# Altium PCB bigpine-camera.PcbDoc
Units mm, origin at the board's own origin, x right, y up, seen from the top; angles counter-clockwise.
Board outline 120 x 52.5 mm, 4 copper layers (Top Layer, Signal Layer 1, Signal Layer 2, Bottom Layer), stack 1.667 mm thick; 18 components, 30 nets, 109 pads, 195 vias.
Unrouted connection lines stored in the file: 32.
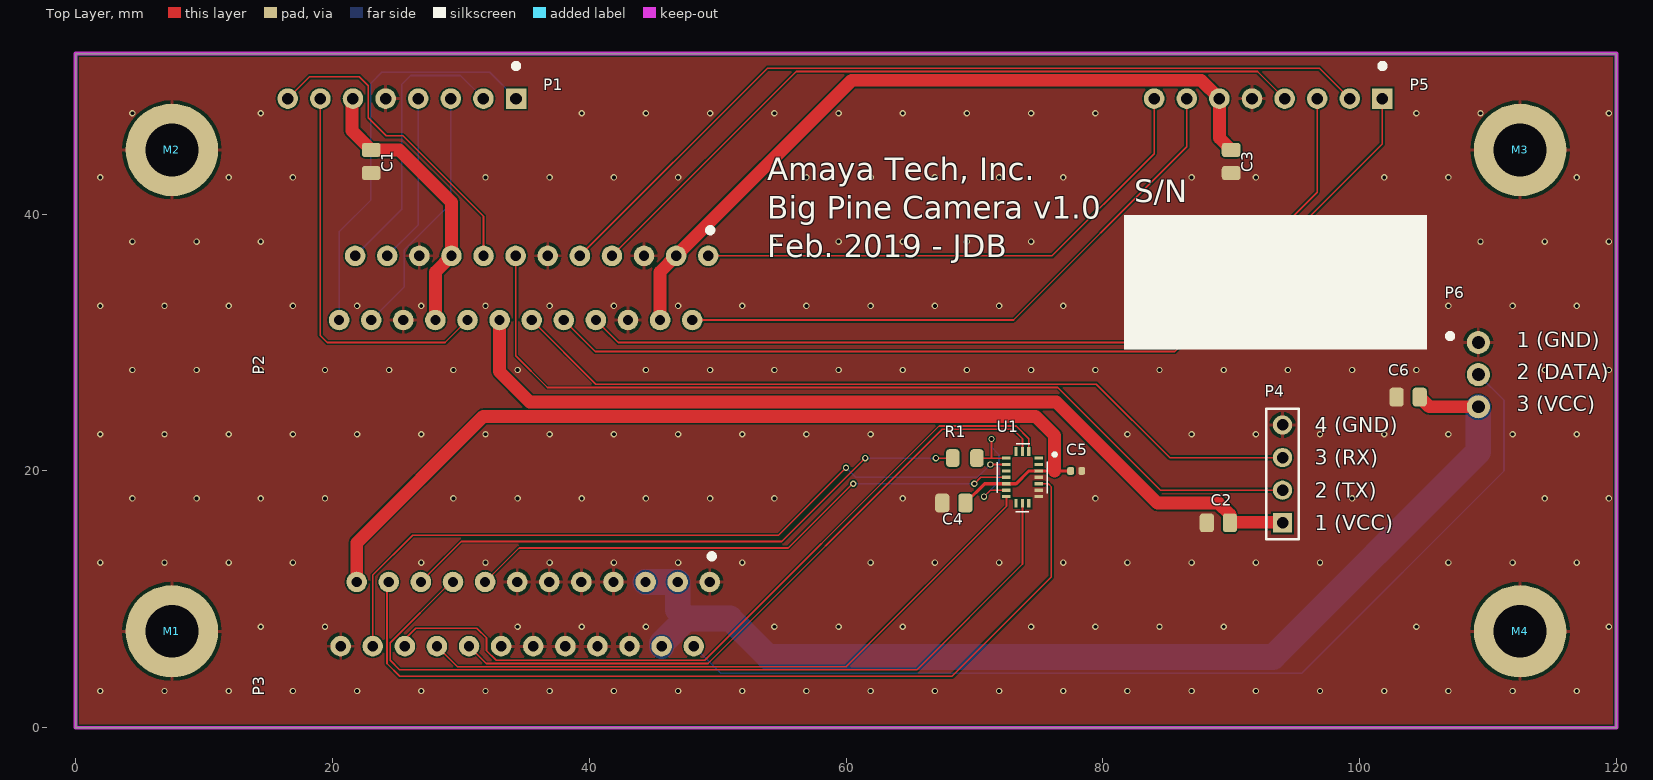
[diagram p0: Top Layer view]
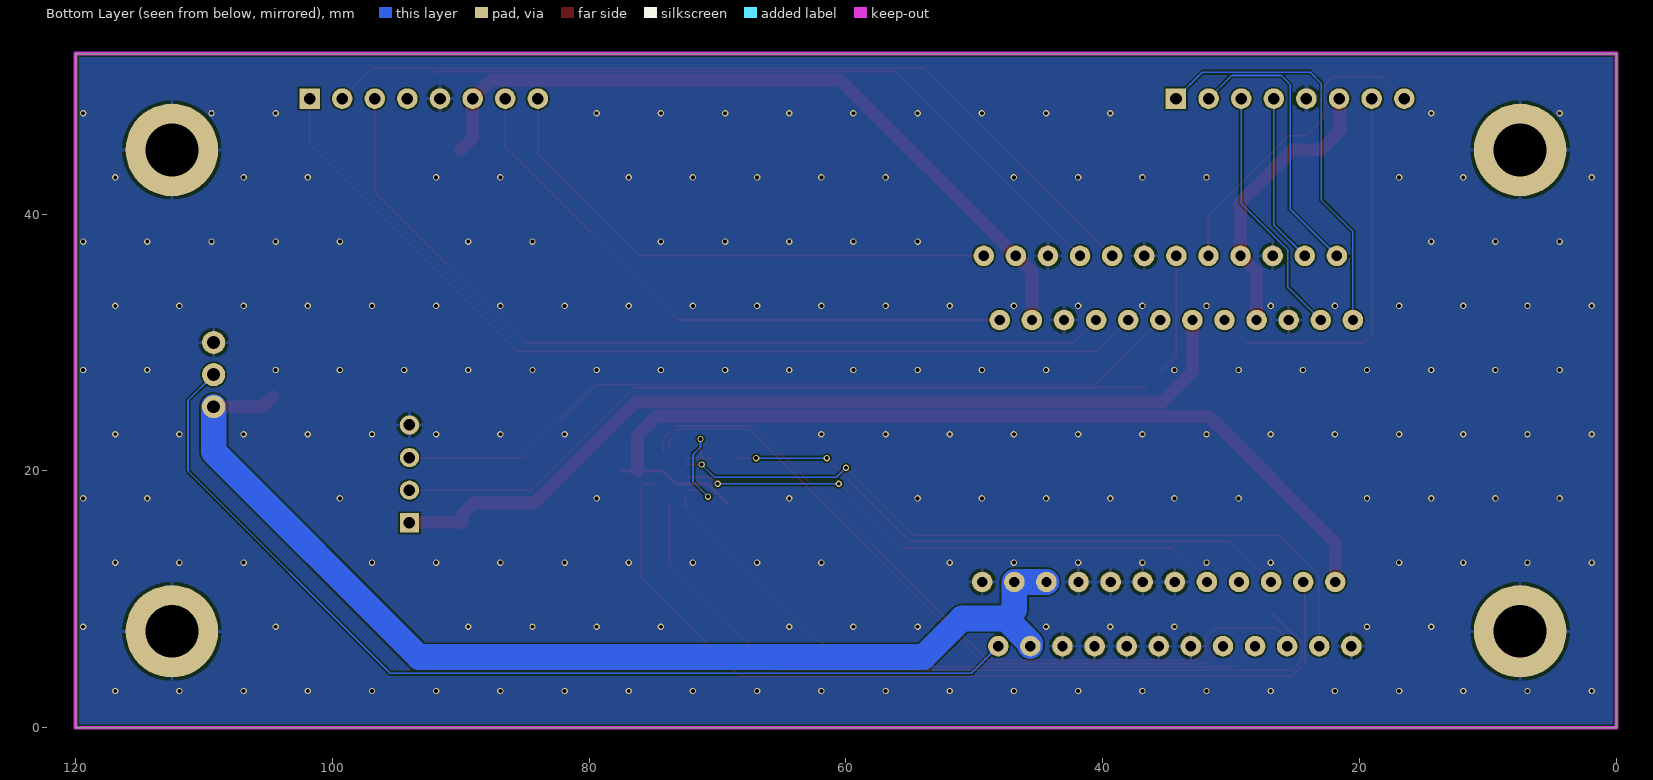
[diagram p1: Bottom Layer view, seen from below]
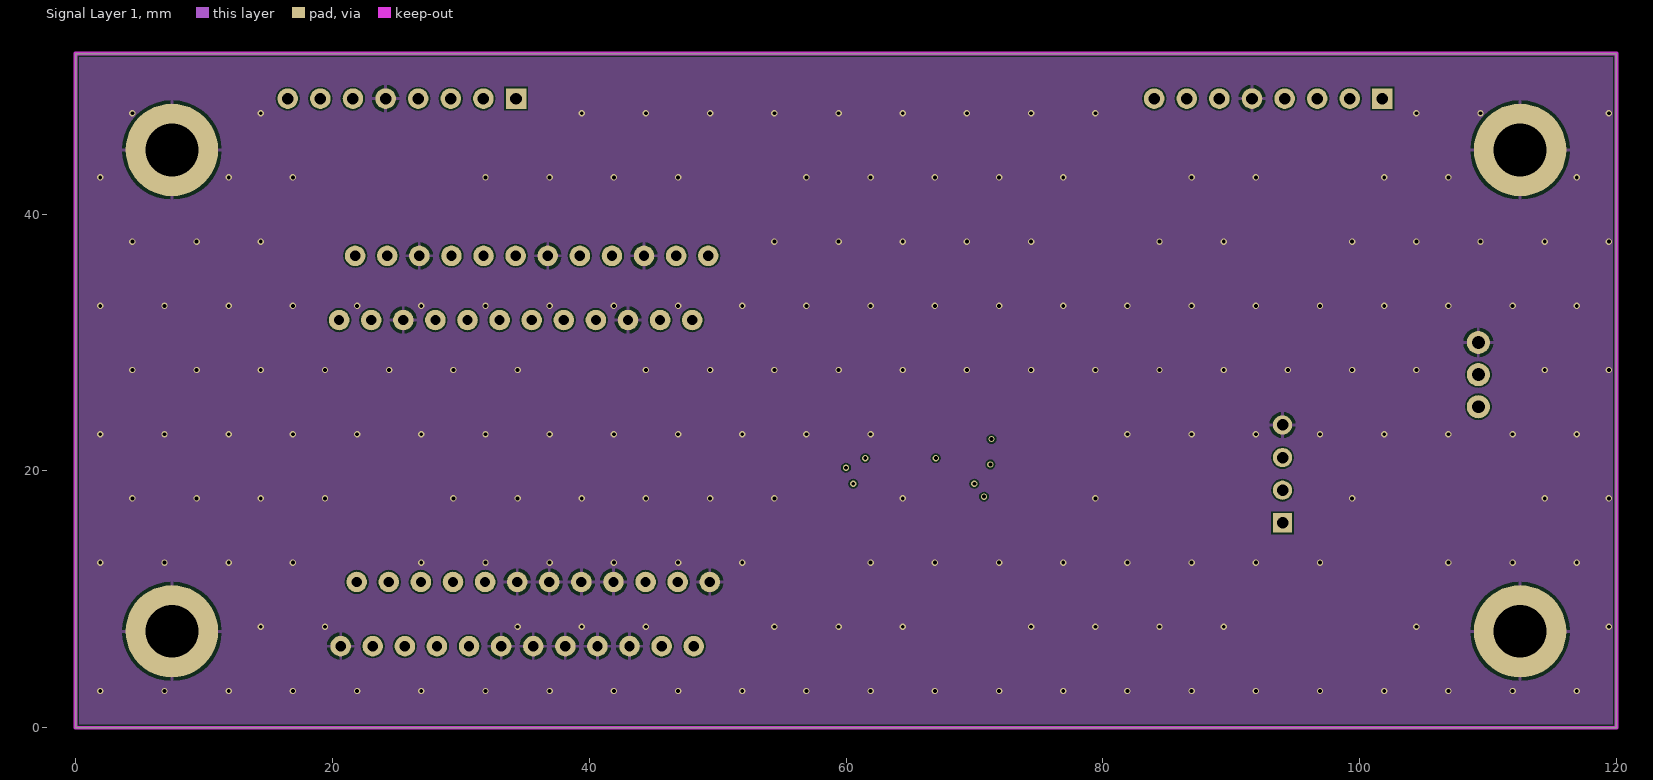
[diagram p2: Signal Layer 1]
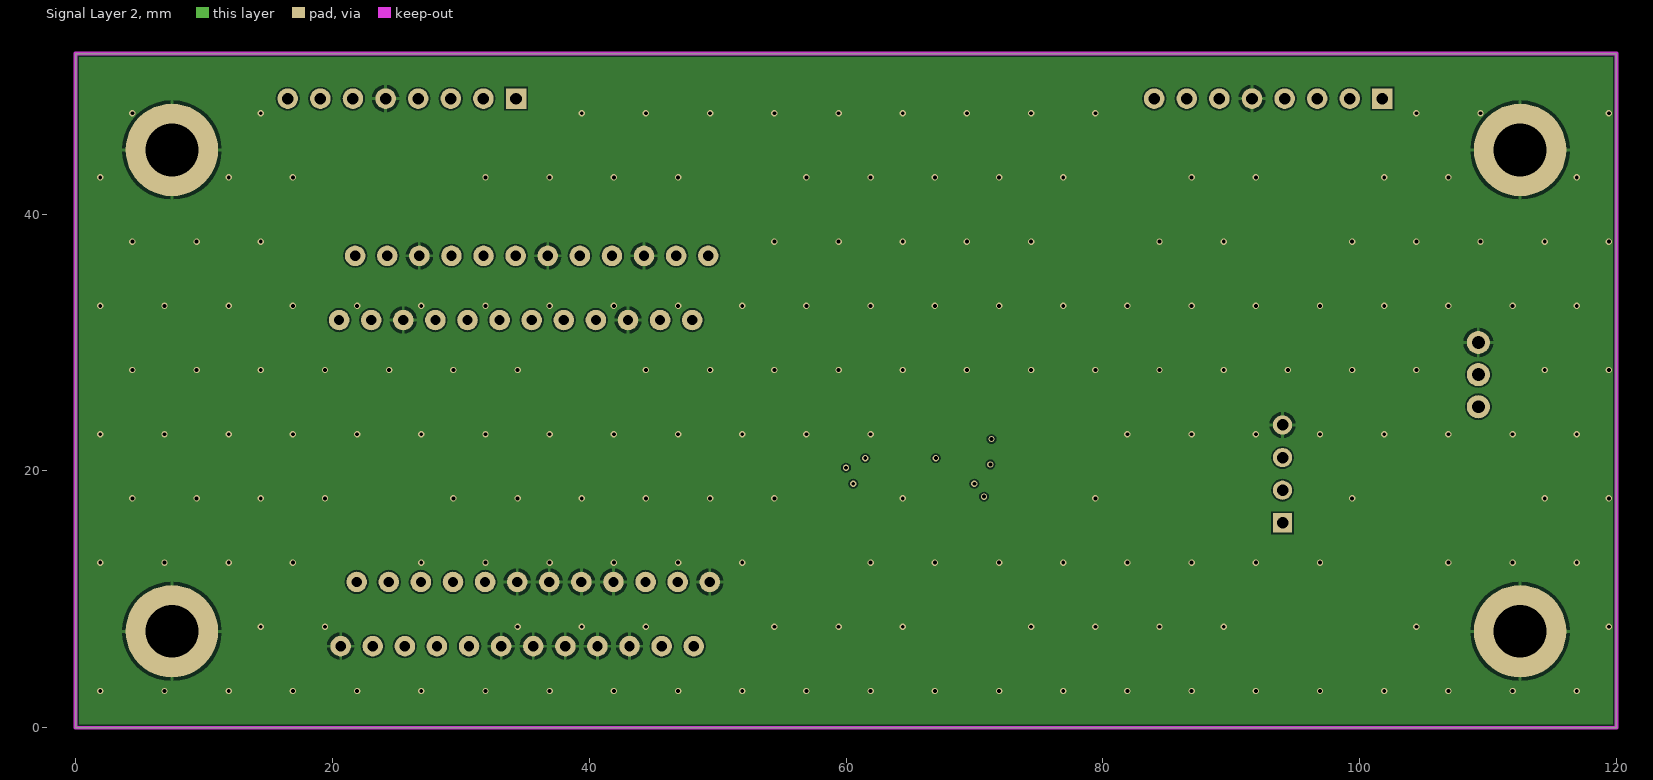
[diagram p3: Signal Layer 2]
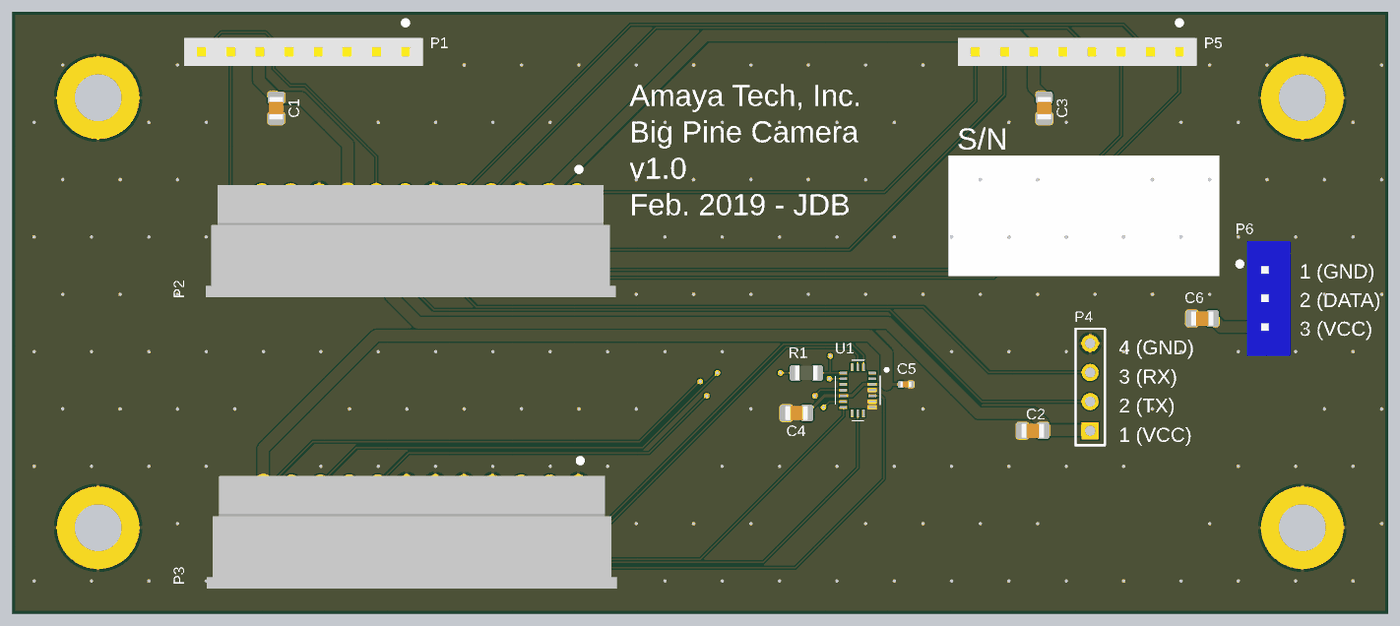
[diagram p4: 3D render of the assembled board from above, using the file's embedded part models]

## Layer stack, top to bottom
Top Solder: solder mask 0.0102, Solder Resist, Dk 3.5
Top Layer: signal copper 0.0356
Dielectric1: core 1.143, FR-4, Dk 4.8
Signal Layer 1: signal copper 0.036
Dielectric 3: prepreg 0.127, Dk 4.2
Signal Layer 2: signal copper 0.036
Dielectric 2: core 0.254, Dk 4.2
Bottom Layer: signal copper 0.0356
Bottom Solder: solder mask 0.0102, Solder Resist, Dk 3.5

## Board outline
0,0 0,52.5 120,52.5 120,0

## Design rules (kind name [scope] priority, off if disabled: settings)
Clearance [All] p1: gap=0.125 ignorepadtopadclearanceinfootprint=FALSE
ComponentClearance [All] p1 off: gap=0.254 collisioncheckmode=3 verticalgap=0.254 showdistances=FALSE
HoleSize [All] p1: absolutevalues=TRUE maxlimit=100 minlimit=0.3 maxpercent=80.000 minpercent=20.000
MinimumSolderMaskSliver [All] p1: minsoldermaskwidth=0.1
PlaneConnect [All] p1: pad.planeconnectstyle=Relief pad.reliefexpansion=0.508 pad.reliefentries=4 pad.reliefconductorwidth=0.254 pad.reliefairgap=0.254 via.planeconnectstyle=Direct via.reliefexpansion=0.508 via.reliefentries=4 via.reliefconductorwidth=0.254 via.reliefairgap=0.254
PolygonConnect [All] p1: thpad.connectstyle=Relief thpad.reliefconductorwidth=0.254 thpad.reliefentries=4 thpad.polygonreliefangle="90 Angle" thpad.airgapwidth=0.254 smdpad.connectstyle=Direct smdpad.reliefconductorwidth=0.254 smdpad.reliefentries=4 smdpad.polygonreliefangle="90 Angle" smdpad.airgapwidth=0.254 via.connectstyle=Direct via.reliefconductorwidth=0.254 via.reliefentries=4 via.polygonreliefangle="90 Angle" via.airgapwidth=0.254
RoutingVias [All] p1: holewidth=0.3 width=0.5 viastyle="Through Hole" minholewidth=0.3 minwidth=0.5 maxholewidth=1 maxwidth=1.2
SilkToSilkClearance [All] p1: silktosilkclearance=0.1
SilkToSolderMaskClearance SilkscreenOverComponentPads [IsPad] p1: minsilkscreentomaskgap=0.1 clearancetoexposedcopper=TRUE
SolderMaskExpansion [All] p1: expansion=0.05
Width [All] p1: maxlimit=500 minlimit=0.125 preferedwidth=0.125
24 further rules are at their usual default settings.

## Classes and differential pairs
component class camera: C1 C2 C4 C5 C6 M1 M2 M3 M4 P1 P2 P3 P4 P5 P6 R1 U1

## Components (designator, comment, footprint, x,y, rotation, side; value= is the part's Value field where it differs from the comment)
C1 "CL21B106KOQNNNE" CAPC200X125X145L45N 23.02,44.1 r270 top value=10uF
C2 "CL21B106KOQNNNE" CAPC200X125X145L45N 89,15.96 r180 top value=10uF
C3 "CL21B106KOQNNNE" CAPC200X125X145L45N 90,44.1 r270 top value=10uF
C4 "CL21B106KOQNNNE" CAPC200X125X145L45N 68.4,17.5 r180 top value=10uF
C5 "C1005X7R1E224K050BE" CAPC100X50X55L25N 77.93,20 r0 top value=220nF
C6 "CL21B106KOQNNNE" CAPC200X125X145L45N 103.78,25.75 r180 top value=10uF
M1 "MOUNT" M4_MOUNT 7.5,7.5 r0 top locked
M2 "MOUNT" M4_MOUNT 7.5,45 r0 top locked
M3 "MOUNT" M4_MOUNT 112.5,45 r0 top locked
M4 "MOUNT" M4_MOUNT 112.5,7.5 r0 top locked
P1 "SSW-108-01-F-S" SSW-108-01-F-S 25.41,49 r180 top
P2 "0039532244" 0039532244 34.745,32.5 r180 top locked
P3 "0039532244" 0039532244 34.865,7.1 r180 top locked
P4 "B4B-XH-A" HDR1X4 94,15.96 r90 top
P5 "SSW-108-01-F-S" SSW-108-01-F-S 92.89,49 r180 top
P6 "B3B-EH-A" B3B-EH-A 109.55,27.5 r270 top locked
R1 "ERJ-6ENF22R0V" RESC2012X70N 69.25,21 r180 top value=22
U1 "BMX055" BMX055 73.738,19.5 r0 top

## Footprints (in the part's own frame and the unit in brackets; to place one, negate y for a bottom-side part, rotate by r counter-clockwise, add the part's x,y. Pads: shape width x height; smd on the part's side, far side on the other; paste and mask are expansions set on the pad)
0039532244 [mm] "FPC connector"
  round 1.6 hole 0.8: 1(-14.525,-4.25) 2(-13.275,0.75) 3(-12.025,-4.25) 4(-10.775,0.75) 5(-9.525,-4.25) 6(-8.275,0.75) 7(-7.025,-4.25) 8(-5.775,0.75) 9(-4.525,-4.25) 10(-3.275,0.75) 11(-2.025,-4.25) 12(-0.775,0.75) 13(0.475,-4.25) 14(1.725,0.75) 15(2.975,-4.25) 16(4.225,0.75) 17(5.475,-4.25) 18(6.725,0.75) 19(7.975,-4.25) 20(9.225,0.75) 21(10.475,-4.25) 22(11.725,0.75) 23(12.975,-4.25) 24(14.225,0.75)
  silkscreen extent -14.88,-6.45 -14.48,-6.05, body extent -17.88,-4.9 17.88,4.9, height 5.4
B3B-EH-A [mm] "2.5mm pitch crimp connector"
  round 1.8 hole 1: 1(-2.5,-0.3) 2(0,-0.3) 3(2.5,-0.3)
  silkscreen extent -3.2,-2.7 -2.8,-2.3, body extent -5,-1.9 5,1.9, height 6
BMX055 [mm] "BST-BMX055-DS000-00"
  rect 0.675x0.25 smd paste-0.025 mask+0.07: 1(1.262,1.5) 2(1.262,1) 3(1.262,0.5) 4(1.262,0) 5(1.262,-0.5) 6(1.262,-1) 7(1.262,-1.5) 11(-1.262,-1.5) 12(-1.262,-1) 13(-1.262,-0.5) 14(-1.262,0) 15(-1.262,0.5) 16(-1.262,1) 17(-1.262,1.5)
  rect 0.25x0.675 smd paste-0.025 mask+0.07: 8(0.5,-2.013) 9(0,-2.013) 10(-0.5,-2.013) 18(-0.5,2.013) 19(0,2.013) 20(0.5,2.013)
  silkscreen extent -1.96,-2.67 2.64,2.62, body extent -1.5,-2.25 1.5,2.25, height 1
CAPC100X50X55L25N [mm] "Capacitor, Chip; 1.00 mm L X 0.50 mm W X 0.55 mm H body"
  rrect52% 0.54x0.6 smd: 1(-0.43,0) 2(0.43,0)
  body extent -0.5,-0.25 0.5,0.25, height 0.55
CAPC200X125X145L45N [mm] "Capacitor, Chip; 2.00 mm L X 1.25 mm W X 1.45 mm H body"
  rrect45% 1.11x1.47 smd: 1(-0.9,0) 2(0.9,0)
  body extent -1,-0.63 1,0.63, height 1.45
HDR1X4 [mm] "Connector; Header; 4 Position"
  rect 1.5x1.5 hole 0.9: 1(0,0)
  round 1.5 hole 0.9: 2(2.54,0) 3(5.08,0) 4(7.62,0)
  silkscreen extent -1.27,-1.27 8.89,1.27
M4_MOUNT [mm] "M4 Clearance Hole"
  round 7.2 hole 4.1: 1(0,0)
RESC2012X70N [mm] "Resistor, Chip; 2.00 mm L X 1.25 mm W X 0.70 mm H body"
  rrect50% 1.04x1.38 smd: 1(-0.94,0) 2(0.94,0)
  body extent -1,-0.63 1,0.63, height 0.7
SSW-108-01-F-S [mm] "Through-hole post socket 0.1\" pitch"
  rect 1.6x1.6 hole 0.9: 1(-8.89,0)
  round 1.6 hole 0.9: 2(-6.35,0) 3(-3.81,0) 4(-1.27,0) 5(1.27,0) 6(3.81,0) 7(6.35,0) 8(8.89,0)
  silkscreen extent -9.09,-2.74 -8.69,-2.34, body extent -10.41,-1.21 10.41,1.21, height 8.51

## Part data
C1 C2 C3 C4 C6: library part LMK212B7106KG, "Ceramic Capacitor 10uF ±10% 16V X7R 0805", Manufacturer=Samsung, Package=0805, Tolerance=±10%, Voltage=16V, Manufacturer P/N=CL21B106KOQNNNE, Tr=-55:105
C5: library part TMK105B7224KV, "Ceramic Capacitor 220nF ±10% 25V X7R 0402", Manufacturer=TDK, Package=0402, Tolerance=±10%, Voltage=25V, Manufacturer P/N=C1005X7R1E224K050BE
P1 P5: library part "Header 8", "Through-hole post socket 0.1\" pitch", Manufacturer=Samtec, Manufacturer P/N=SSW-108-01-F-S
P2 P3: "FPC connector", Manufacturer=Molex, Manufacturer P/N=0039532244
P4: library part "Header 4", "Header, 4-Pin", Manufacturer=JST, Manufacturer P/N=B4B-XH-A
P6: library part "Header 3", "2.5mm pitch crimp connector", Manufacturer=JST, Manufacturer P/N=B3B-EH-A
R1: library part "RES 0402", "Thick Film Resistor 22 ±1% 0805", Manufacturer=Panasonic, Package=0805, Tolerance=±1%, Manufacturer P/N=ERJ-6ENF22R0V, Tr=-55:155
U1: "9-DOF Sensor Module", Manufacturer=Bosch, Manufacturer P/N=BMX055

## Via types
v1: diameter 0.5, hole 0.3, Top Layer to Bottom Layer, tented top, 187 vias
v2: diameter 0.5, hole 0.3, Top Layer to Bottom Layer, 8 vias

## Nets (pads, with @x,y where several pads share a name; then routed paths per layer and width w, separated by ;. In a path a pad name is that pad's centre, name@x,y a point inside that pad or via, vN(x,y) a via of type N, cw(c..) or ccw(c..) an arc to the next point about the centre after c; other vN are vias at no path point)
CAM1_CS: P1.1 P2.24 | length 32
  Bottom Layer w0.125: P2.24 20.52,38.62 23,41.1 23,50.2 23.85,51.05 32.25,51.05 P1.1
CAM1_MISO: P1.3 P2.22 | length 19.8
  Bottom Layer w0.125: P2.22 25.6,34.33 25.6,37.2 29.22,40.82 P1.3
CAM1_MOSI: P1.2 P2.23 | length 22.2
  Bottom Layer w0.125: P2.23 25.4,40.38 25.4,50.1 26.1,50.8 29.96,50.8 P1.2
CAM1_SCL: P1.8 P2.15 | length 25
  Top Layer w0.125: P1.8 18.22,50.7 22.1,50.7 22.8,50 22.8,47.5 24.2,46.1 25.5,46.1 31.77,39.83 P2.15
CAM1_SCLK: P1.4 P2.21 | length 13.2
  Bottom Layer w0.125: P2.21 26.68,39.16 P1.4
CAM1_SDA: P1.7 P2.16 | length 30.9
  Top Layer w0.125: P1.7 19.06,30.54 19.6,30 28.77,30 P2.16
CAM2_CS: P2.10 P5.1 | length 75
  Top Layer w0.125: P2.10 40.47,29.3 85.6,29.3 101.78,45.48 P5.1
CAM2_MISO: P2.8 P5.3 | length 69.1
  Top Layer w0.125: P2.8 42.27,30 85,30 96.7,41.7 P5.3
CAM2_MOSI: P2.9 P5.2 | length 67
  Top Layer w0.125: P2.9 53.883,51.363 96.877,51.363 P5.2
CAM2_SCL: P2.1 P5.8 | length 42.3
  Top Layer w0.125: P2.1 76.05,36.75 84,44.7 P5.8
CAM2_SCLK: P2.7 P5.4 | length 59.2
  Top Layer w0.125: P2.7 56.133,51.113 92.047,51.113 P5.4
CAM2_SDA: P2.2 P5.7 | length 47.9
  Top Layer w0.125: P2.2 73.05,31.75 86.54,45.24 P5.7
GND: C1.2 C2.2 C3.2 C4.2 C5.2 C6.2 M1.1 M2.1 M3.1 M4.1 P1.5 P2.5 P2.6 P2.11 P2.19 P2.20 P3.1 P3.6 P3.7 P3.8 P3.9 P3.10 P3.11 P3.12 P3.13 P3.14 P3.24 P4.4 P5.5 P6.1 U1.4 U1.6 U1.7
  other v1: 1.92,2.858 6.92,2.858 11.92,2.858 16.92,2.858 21.92,2.858 26.92,2.858 31.92,2.858 36.92,2.858 41.92,2.858 46.92,2.858 51.92,2.858 56.92,2.858 61.92,2.858 66.92,2.858 71.92,2.858 76.92,2.858 81.92,2.858 86.92,2.858 91.92,2.858 96.92,2.858 101.92,2.858 106.92,2.858 111.92,2.858 116.92,2.858 14.42,7.858 19.42,7.858 34.42,7.858 39.42,7.858 44.42,7.858 54.42,7.858 59.42,7.858 64.42,7.858 74.42,7.858 79.42,7.858 84.42,7.858 89.42,7.858 104.42,7.858 119.42,7.858 1.92,12.858 6.92,12.858 11.92,12.858 16.92,12.858 26.92,12.858 31.92,12.858 36.92,12.858 41.92,12.858 46.92,12.858 51.92,12.858 61.92,12.858 66.92,12.858 71.92,12.858 76.92,12.858 81.92,12.858 86.92,12.858 91.92,12.858 96.92,12.858 106.92,12.858 111.92,12.858 116.92,12.858 4.42,17.858 9.42,17.858 14.42,17.858 19.42,17.858 29.42,17.858 34.42,17.858 39.42,17.858 44.42,17.858 49.42,17.858 54.42,17.858 64.42,17.858 79.42,17.858 99.42,17.858 114.42,17.858 119.42,17.858 1.92,22.858 6.92,22.858 11.92,22.858 16.92,22.858 21.92,22.858 26.92,22.858 31.92,22.858 36.92,22.858 41.92,22.858 46.92,22.858 51.92,22.858 56.92,22.858 61.92,22.858 81.92,22.858 86.92,22.858 91.92,22.858 96.92,22.858 101.92,22.858 106.92,22.858 111.92,22.858 116.92,22.858 4.42,27.858 9.42,27.858 14.42,27.858 19.42,27.858 24.42,27.858 29.42,27.858 34.42,27.858 44.42,27.858 49.42,27.858 54.42,27.858 59.42,27.858 64.42,27.858 69.42,27.858 74.42,27.858 79.42,27.858 84.42,27.858 89.42,27.858 94.42,27.858 99.42,27.858 104.42,27.858 114.42,27.858 119.42,27.858 1.92,32.858 6.92,32.858 11.92,32.858 16.92,32.858 21.92,32.858 26.92,32.858 31.92,32.858 36.92,32.858 41.92,32.858 46.92,32.858 51.92,32.858 56.92,32.858 61.92,32.858 66.92,32.858 71.92,32.858 76.92,32.858 81.92,32.858 86.92,32.858 91.92,32.858 96.92,32.858 101.92,32.858 106.92,32.858 111.92,32.858 116.92,32.858 4.42,37.858 9.42,37.858 14.42,37.858 54.42,37.858 59.42,37.858 64.42,37.858 69.42,37.858 74.42,37.858 84.42,37.858 89.42,37.858 99.42,37.858 104.42,37.858 109.42,37.858 114.42,37.858 119.42,37.858 1.92,42.858 11.92,42.858 16.92,42.858 31.92,42.858 36.92,42.858 41.92,42.858 46.92,42.858 56.92,42.858 61.92,42.858 66.92,42.858 71.92,42.858 76.92,42.858 86.92,42.858 91.92,42.858 101.92,42.858 106.92,42.858 116.92,42.858 4.42,47.858 14.42,47.858 39.42,47.858 44.42,47.858 49.42,47.858 54.42,47.858 59.42,47.858 64.42,47.858 69.42,47.858 74.42,47.858 79.42,47.858 104.42,47.858 109.42,47.858 119.42,47.858
IMU_CS1: P3.22 U1.16 | length 59.1
  Top Layer w0.125: P3.22 23.14,11.89 26.25,15 54.75,15 v2(60,20.25) ; v2(71.25,20.5) U1.16
  Bottom Layer w0.125: v2(60,20.25) 60.75,19.5 70.25,19.5 v2(71.25,20.5)
IMU_CS2: P3.21 U1.5 | length 69.5
  Top Layer w0.125: P3.21@24.25,11 24.25,5 25.25,4 68.25,4 76,11.75 76,18.75 75.75,19 U1.5
IMU_CS3: P3.20 U1.20 | length 60.4
  Top Layer w0.125: P3.20@25,6.25 26.5,7.75 31.25,7.75 32,7 32,6 32.75,5.25 49,5.25 67.25,23.5 73.25,23.5 74.237,22.513 U1.20
IMU_INT_ACCEL: P3.16 U1.19 | length 52.3
  Top Layer w0.125: P3.16 31.99,5 49.25,5 67.5,23.25 73,23.25 73.75,22.5 U1.19@73.75,21.75
IMU_INT_GYRO: P3.15 U1.14 | length 44
  Top Layer w0.125: P3.15 34.54,14 55.5,14 60.5,19 v2(60.562,19) ; v2(70,19) 70.5,19.5 U1.14
  Bottom Layer w0.125: v2(60.562,19) v2(70,19)
IMU_MISO: P3.19 R1.2 | length 45.4
  Top Layer w0.125: P3.19 30.04,14.5 55,14.5 v2(61.5,21) ; v2(67,21) R1.2
  Bottom Layer w0.125: v2(61.5,21) v2(67,21)
IMU_MOSI: P3.18 U1.11 | length 51
  Top Layer w0.125: P3.18 29.74,4.75 60,4.75 72.5,17.25 U1.11@72.5,18
IMU_SCK: P3.17 U1.9 | length 65.9
  Top Layer w0.125: P3.17 29.243,11.35 24.5,6.607 24.5,5.25 25.25,4.5 65.5,4.5 73.75,12.75 U1.9@73.75,17.5
LIDAR_RX: P2.12 P4.3 | length 62.9
  Top Layer w0.125: P2.12 40.52,26.75 79.5,26.75 85.21,21.04 P4.3
LIDAR_TX: P2.13 P4.2 | length 71.8
  Top Layer w0.125: P2.13 34.27,28.98 36.75,26.5 76.5,26.5 84.5,18.5 P4.2
MOT1_DATA: P3.2 P6.2 | length 78.8
  Bottom Layer w0.125: P3.2 50.24,4.25 95.5,4.25 111.25,20 111.25,25.5 P6.2
NetR1_1: R1.1 U1.12 U1.17 | length 10.9
  Top Layer w0.125: R1.1 71.333,21 ; v2(70.75,18) 71.25,18.5 U1.12 ; v2(71.333,22.483) 71.333,21 ; U1.17@72.5,21 U1.17 71.333,21
  Bottom Layer w0.125: v2(70.75,18) 71.92,19.17 71.92,21.268 71.333,21.856 v2(71.333,22.483)
VCAM1: C1.1 P1.6 P2.17 P2.18 | length 22.3
  Top Layer w1: P1.6@21.52,49 21.52,46.5 C1.1 25.2,45 29.27,40.93 P2.17 28.02,35.5 P2.18
VCAM2: C3.1 P2.3 P2.4 P5.6 | length 58.5
  Top Layer w1: P2.4 45.52,35.5 P2.3 60.445,50.425 87.655,50.425 P5.6 89.08,45.92 C3.1
VCAP: C4.1 C5.1 P3.23 U1.3 U1.13 | length 74.1
  Top Layer w0.25: C4.1 70.8,19 U1.13@72.5,19 ; U1.13 73.25,19 74.25,20 U1.3 76.25,20 C5.1
  Top Layer w1: P3.23 21.89,14.39 31.75,24.25 74.75,24.25 76.25,22.75 76.25,20
VLIDAR: C2.1 P2.14 P4.1 | length 70.3
  Top Layer w1: P2.14 33.02,27.73 35.375,25.375 76.375,25.375 84.25,17.5 89,17.5 89.9,16.6 C2.1@89.9,16 ; C2.1 C2.1@89.9,16 ; P4.1 93.96,16 C2.1@89.9,16
VMOT: C6.1 P3.3 P3.4 P3.5 P6.3 | length 86.8
  Top Layer w0.125: P6.3 P6.3@109.5,25
  Top Layer w1: C6.1 105.43,25 P6.3
  Bottom Layer w2: P3.5 P3.3 46.89,9.178 47.568,8.5 ; P3.4 45.64,6.572 47.568,8.5 ; P6.3 109.25,21.5 93.25,5.5 53.96,5.5 50.96,8.5 47.568,8.5
pads on no net: U1.1 U1.2 U1.8 U1.10 U1.15 U1.18

## Polygon pours and split planes (outlines as drawn)
GND on Bottom Layer "GND_L04_P000" (solid, pour order 0): 0,0 120,0 120,52.5 0,52.5
GND on Top Layer "GND_L01_P002" (solid, pour order 2): 0,0 120,0 120,52.5 0,52.5
GND on Signal Layer 1 "TOP_GND" (solid, remove dead copper, pour order 4): 0,0 120,0 120,52.5 0,52.5
GND on Signal Layer 2 "TOP_GND" (solid, remove dead copper, pour order 6): 0,0 120,0 120,52.5 0,52.5

## Keep-outs
Keep-Out Layer:
  the board outline again, w0.3

## Other copper
Top Layer:
  region net VCAP: 75,20

## Silkscreen, mask and mechanical layers (free items; w line width, h text height)
Top Overlay:
  rectangle: 81.65,29.45 105.25,39.95
  text "S/N" at 82.45,40.35 h3
  text "Amaya Tech, Inc. / Big Pine Camera v1.0 / Feb. 2019 - JDB" at 53.883,36.05 h3
  text "1 (GND)" at 112.25,29.25 h2
  text "2 (DATA)" at 112.25,26.75 h2
  text "3 (VCC)" at 112.25,24.25 h2
  text "4 (GND)" at 96.5,22.62 h2
  text "3 (RX)" at 96.5,20.08 h2
  text "2 (TX)" at 96.5,17.54 h2
  text "1 (VCC)" at 96.5,15 h2
Mechanical 2:
  the board outline again, w0.127
Mechanical 10:
  text "1. FRONT ASSEMBLY NOTE #1" at 105.205,109.62 h1.14
Mechanical 11:
  text "1. FRONT CONFORMAL COAT NOTE #1" at 105.205,107.715 h1.14
Mechanical 16:
  lines w0.127: -58,-3.025 -52.92,-3.025 ; -58,50.95 -52.92,50.95 ; -58,104.925 -52.92,104.925 ; 11.85,-57 11.85,-51.92 ; 11.85,153.82 11.85,158.9 ; 30.9,-51.92 30.9,-21.44 66.46,-21.44 ; 30.9,-30.584 66.46,-30.584 ; 32.17,-33.886 42.33,-33.886 ; 37.631,-40.998 38.393,-40.998 ; 37.631,-40.363 38.393,-40.363 ; 37.631,-38.458 38.393,-38.458 ; 37.631,-37.823 38.393,-37.823 ; 37.631,-35.918 38.393,-35.918 ; 37.631,-35.283 38.393,-35.283 ; 81.7,-57 81.7,-51.92 ; 81.7,153.82 81.7,158.9 ; 102.02,-44.3 216.32,-44.3 ; 102.02,-36.68 216.32,-36.68 ; 102.02,-29.06 140.12,-29.06 ; 102.02,143.66 216.32,143.66 ; 102.02,148.74 216.32,148.74 ; 102.02,153.82 102.02,138.58 216.32,138.58 ; 117.26,138.58 117.26,153.82 ; 129.96,138.58 129.96,153.82 ; 140.12,-51.92 140.12,-36.68 140.12,-21.44 ; 151.55,-57 151.55,-51.92 ; 151.55,153.82 151.55,158.9 ; 193.46,-51.92 193.46,-36.68 ; 200.445,138.58 200.445,153.82 ; 216.32,-3.025 221.4,-3.025 ; 216.32,50.95 221.4,50.95 ; 216.32,104.925 221.4,104.925 ; 66.46,-21.44 102.02,-21.44 ; 66.46,-21.44 66.46,-51.92 102.02,-51.92 ; 102.02,-51.92 216.32,-51.92 ; 102.02,-51.92 102.02,-21.44 ; 102.02,-21.44 140.12,-21.44 ; 140.12,-21.44 216.32,-21.44 216.32,-51.92 ; 216.32,-51.92 -52.92,-51.92 -52.92,153.82 216.32,153.82 216.32,-51.92 ; -58,-57 221.4,-57 221.4,158.9 -58,158.9 -58,-57
  lines w0.178: 38.012,-40.744 38.012,-39.982 ; 38.012,-38.204 38.012,-37.442 ; 38.012,-35.664 38.012,-34.902
  text "1" at -23.676,155.471 h1.78
  text "2" at 46.191,155.471 h1.78
  text "3" at 115.914,155.471 h1.78
  text "4" at 185.789,155.471 h1.78
  text "REV" at 103.29,150.01 h1.7
  text "DATE" at 118.53,150.01 h1.7
  text "DESC" at 131.23,150.01 h1.7
  text "ENG" at 202.35,150.01 h1.7
  text "1" at 103.29,144.93 h1.7
  text "02/25/19" at 118.53,144.93 h1.7
  text "INITIAL RELEASE" at 131.23,144.93 h1.7
  text "[J. DOE]" at 202.35,144.93 h1.7
  text "A" at -56.095,129.614 h1.78
  text "A" at 218.225,129.614 h1.78
  text "B" at -56.095,75.639 h1.78
  text "B" at 218.225,75.639 h1.78
  text "C" at -56.095,21.664 h1.78
  text "C" at 218.225,21.664 h1.78
  text "ENGINEER:" at 103.29,-23.98 h1.14
  text "TITLE:" at 141.39,-23.98 h1.14
  text ".Client" at 69,-25.781 h2.54
  text "ALL DIMENSIONS ARE IN MM (INCHES)" at 32.805,-25.885 h1.2
  text "J. Brinton" at 103.29,-27.155 h1.78
  text ".ClientAddress" at 69,-28.321 h2.54
  text "TOLERANCES:" at 43.854,-30.076 h1.2
  text ".ClientProject" at 142.025,-30.965 h2.2
  text "PCB DESIGNER:" at 103.29,-31.473 h1.14
  text "D" at -56.095,-32.184 h1.78
  text "D" at 218.225,-32.184 h1.78
  text "DECIMALS" at 32.805,-32.87 h1.2
  text "J. Brinton" at 103.29,-34.775 h1.78
  text ".X     0.1" at 32.805,-36.045 h1.2
  text ".XX    0.05" at 32.805,-38.585 h1.2
  text "DATE:" at 103.29,-39.22 h1.14
  text "PART NO.:" at 141.39,-39.22 h1.14
  text "REV:" at 194.73,-39.22 h1.14
  text ".XXX   0.005" at 32.805,-41.125 h1.2
  text "Designed By:" at 69,-41.125 h2.54
  text "02/25/2019" at 103.29,-42.395 h1.7
  text "-" at 141.39,-42.395 h1.78
  text "1" at 194.73,-42.395 h1.78
  text ".Company" at 74.08,-43.665 h2.54
  text ".CompanyAddress" at 74.08,-46.205 h2.54
  text "*UNLESS OTHERWISE NOTED" at 32.17,-46.84 h1.2
  text "FILE NAME:" at 103.29,-46.84 h1.14
  text "DWG NO:" at 141.39,-46.84 h1.14
  text "SCALE:" at 194.73,-46.84 h1.14
  text ".CompanyEmail" at 74.08,-48.745 h2.54
  text ".PCB_FILE_NAME_NO_PATH" at 58.84,-49.888 h1.78
  text ".PCB_FILE_NAME_NO_PATH" at 104.56,-49.888 h1.78
  text "-" at 141.39,-50.015 h1.78
  text "1:1" at 194.73,-50.015 h1.78
  text "1" at -23.676,-55.349 h1.78
  text "2" at 46.191,-55.349 h1.78
  text "3" at 115.914,-55.349 h1.78
  text "4" at 185.789,-55.349 h1.78
Drill Drawing:
  text "1. LEAD-FREE HASL" at 105.5,107.81 h1.14
  text "2. SOLDERMASK: GREEN" at 105.5,105.27 h1.14
  text "3. SILKSCREEN: WHITE" at 105.5,102.73 h1.14
  text "4. NO BOTTOM SOLDERMASK" at 105.5,100.19 h1.14
  text ".Legend" at -35,62.5 h1.2
Mechanical 26:
  text "1. BOTTOM ASSEMBLY NOTE #1" at 154.1,109.62 h1.14
Mechanical 27:
  text "1. BOTTOM CONFORMAL COAT NOTE #1" at 154.1,107.715 h1.14
Mechanical 32:
  lines w0.127: -58,-3.025 -52.92,-3.025 ; -58,50.95 -52.92,50.95 ; -58,104.925 -52.92,104.925 ; -52.92,-44.3 61.38,-44.3 ; -52.92,-36.68 61.38,-36.68 ; -52.92,138.58 61.38,138.58 61.38,153.82 ; -52.92,143.66 61.38,143.66 ; -52.92,148.74 61.38,148.74 ; -37.045,138.58 -37.045,153.82 ; -30.06,-51.92 -30.06,-36.68 ; 11.85,-57 11.85,-51.92 ; 11.85,153.82 11.85,158.9 ; 23.28,-51.92 23.28,-36.68 23.28,-21.44 ; 23.28,-29.06 61.38,-29.06 ; 33.44,138.58 33.44,153.82 ; 46.14,138.58 46.14,153.82 ; 81.7,-57 81.7,-51.92 ; 81.7,153.82 81.7,158.9 ; 96.94,-30.584 132.5,-30.584 ; 121.07,-33.886 131.23,-33.886 ; 125.007,-40.998 125.769,-40.998 ; 125.007,-40.363 125.769,-40.363 ; 125.007,-38.458 125.769,-38.458 ; 125.007,-37.823 125.769,-37.823 ; 125.007,-35.918 125.769,-35.918 ; 125.007,-35.283 125.769,-35.283 ; 132.5,-51.92 132.5,-21.44 96.94,-21.44 ; 151.55,-57 151.55,-51.92 ; 151.55,153.82 151.55,158.9 ; 216.32,-3.025 221.4,-3.025 ; 216.32,50.95 221.4,50.95 ; 216.32,104.925 221.4,104.925 ; -52.92,-51.92 61.38,-51.92 ; -52.92,-51.92 -52.92,-21.44 23.28,-21.44 ; -52.92,-51.92 216.32,-51.92 216.32,153.82 -52.92,153.82 -52.92,-51.92 ; 23.28,-21.44 61.38,-21.44 ; 61.38,-51.92 96.94,-51.92 96.94,-21.44 ; 61.38,-51.92 61.38,-21.44 ; 61.38,-21.44 96.94,-21.44 ; -58,-57 221.4,-57 221.4,158.9 -58,158.9 -58,-57
  lines w0.178: 125.388,-40.744 125.388,-39.982 ; 125.388,-38.204 125.388,-37.442 ; 125.388,-35.664 125.388,-34.902
  text "4" at -22.389,155.471 h1.78
  text "3" at 47.486,155.471 h1.78
  text "2" at 117.209,155.471 h1.78
  text "1" at 187.076,155.471 h1.78
  text "ENG" at -38.95,150.01 h1.7
  text "DESC" at 32.17,150.01 h1.7
  text "DATE" at 44.87,150.01 h1.7
  text "REV" at 60.11,150.01 h1.7
  text "[J. DOE]" at -38.95,144.93 h1.7
  text "INITIAL RELEASE" at 32.17,144.93 h1.7
  text "[MM/DD/YY]" at 44.87,144.93 h1.7
  text "1" at 60.11,144.93 h1.7
  text "A" at -54.825,129.614 h1.78
  text "A" at 219.495,129.614 h1.78
  text "B" at -54.825,75.639 h1.78
  text "B" at 219.495,75.639 h1.78
  text "C" at -54.825,21.664 h1.78
  text "C" at 219.495,21.664 h1.78
  text "TITLE:" at 22.01,-23.98 h1.14
  text "ENGINEER:" at 60.11,-23.98 h1.14
  text ".Client" at 94.4,-25.781 h2.54
  text "ALL DIMENSIONS ARE IN MM (INCHES)" at 130.595,-25.885 h1.2
  text "[J. Doe]" at 60.11,-27.155 h1.78
  text ".ClientAddress" at 94.4,-28.321 h2.54
  text "TOLERANCES:" at 119.546,-30.076 h1.2
  text ".ClientProject" at 21.375,-30.965 h2.2
  text "PCB DESIGNER:" at 60.11,-31.473 h1.14
  text "D" at -54.825,-32.184 h1.78
  text "D" at 219.495,-32.184 h1.78
  text "DECIMALS" at 130.595,-32.87 h1.2
  text "[J. Doe]" at 60.11,-34.775 h1.78
  text ".X     0.1" at 130.595,-36.045 h1.2
  text ".XX    0.05" at 130.595,-38.585 h1.2
  text "REV:" at -31.33,-39.22 h1.14
  text "PART NO.:" at 22.01,-39.22 h1.14
  text "DATE:" at 60.11,-39.22 h1.14
  text "Designed By:" at 94.4,-41.125 h2.54
  text ".XXX   0.005" at 130.595,-41.125 h1.2
  text "1" at -31.33,-42.395 h1.78
  text "-" at 22.01,-42.395 h1.78
  text "[MM/DD/YYYY]" at 60.11,-42.395 h1.7
  text ".Company" at 89.32,-43.665 h2.54
  text ".CompanyAddress" at 89.32,-46.205 h2.54
  text "SCALE:" at -31.33,-46.84 h1.14
  text "DWG NO:" at 22.01,-46.84 h1.14
  text "FILE NAME:" at 60.11,-46.84 h1.14
  text "*UNLESS OTHERWISE NOTED" at 131.23,-46.84 h1.2
  text ".CompanyEmail" at 89.32,-48.745 h2.54
  text ".PCB_FILE_NAME_NO_PATH" at 58.84,-49.888 h1.78
  text "1:1" at -31.33,-50.015 h1.78
  text "-" at 22.01,-50.015 h1.78
  text "4" at -22.389,-55.349 h1.78
  text "3" at 47.486,-55.349 h1.78
  text "2" at 117.209,-55.349 h1.78
  text "1" at 187.076,-55.349 h1.78